# EAGLE board roboboard2 (EAGLE 6.3)
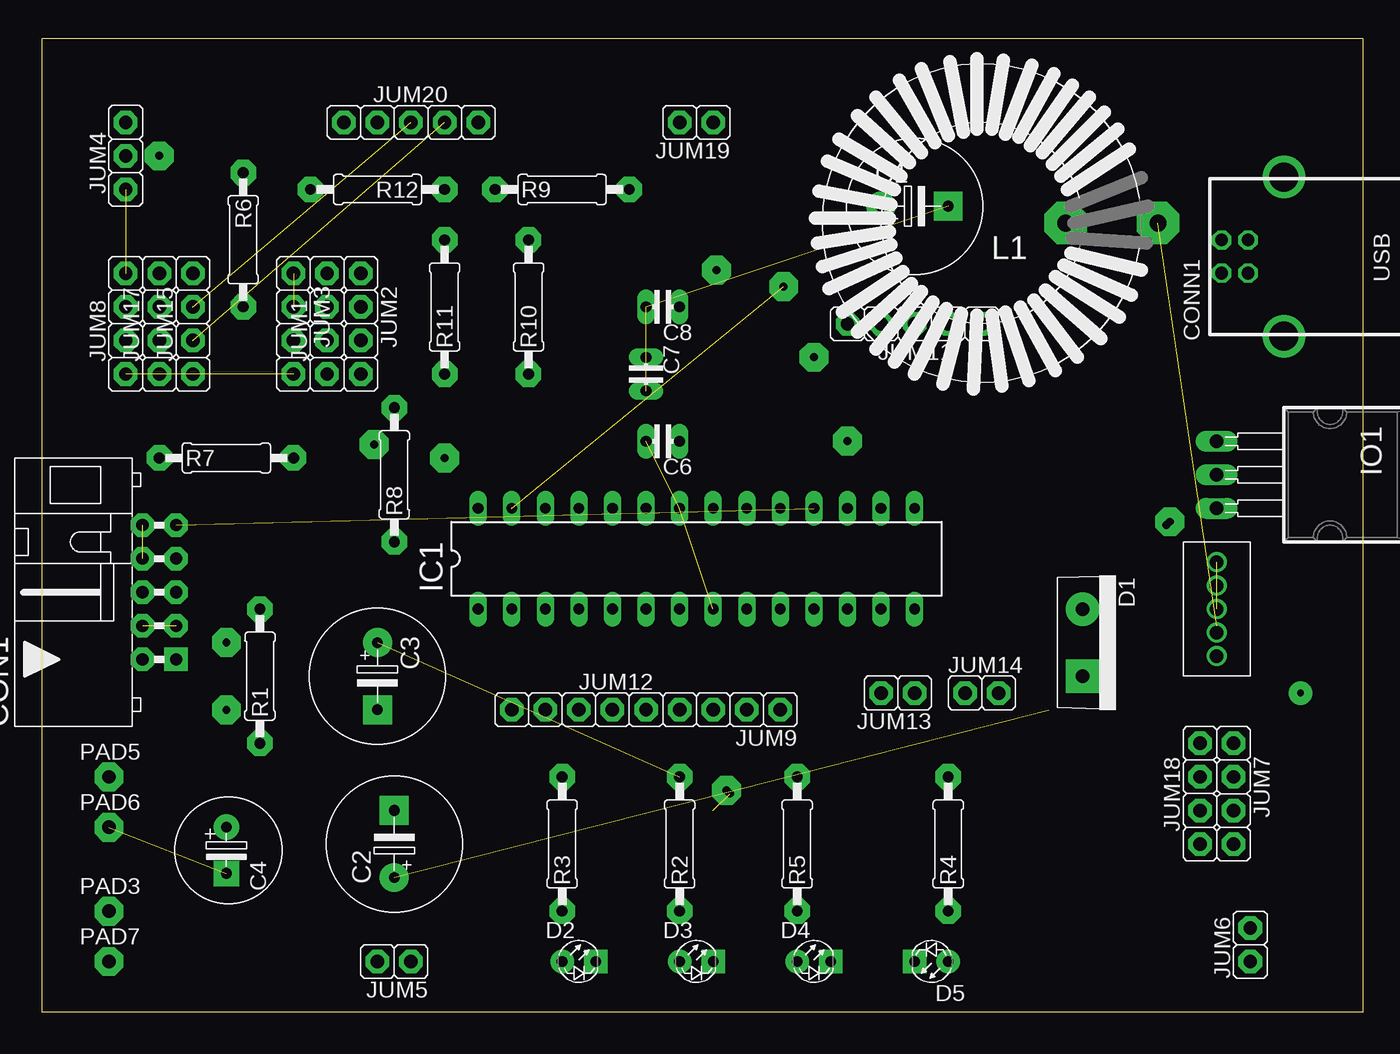
[diagram p0: board, top side]
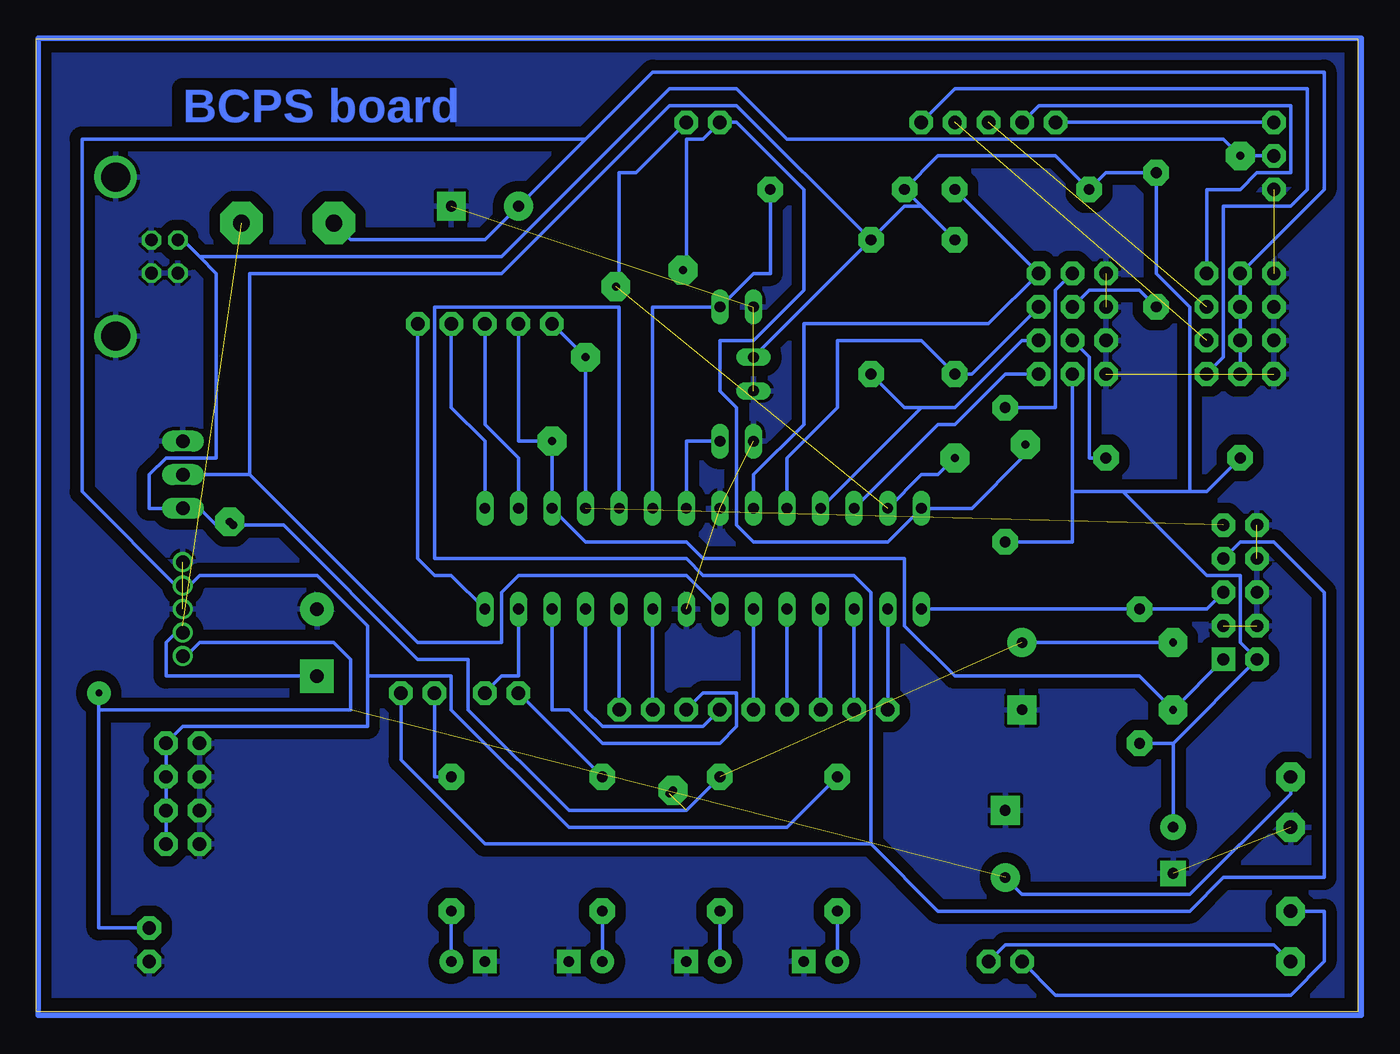
[diagram p1: board, bottom side, seen from below]

Size 100 x 73.65 mm. Coordinates in mm from the lower left corner, seen from the top.
Outline: 0,0 100,0 100,73.65 0,73.65 0,0
Copper layers (1*16): Top 0.035mm / dielectric 1.5mm / Bottom 0.035mm
Design rules "default": minimum track width 10mil, minimum drill 24mil, track to track 8mil, track to pad 8mil, pad to pad 8mil, via to via 8mil, smd to smd 8mil, copper to edge 40mil, drill to drill 8mil, minimum pad ring 10mil, minimum via ring 8mil, stop-mask expansion 4mil, vias tented up to drill 0mil, thermal gap 10mil

## Footprints (pad centres in the part's own frame; a part is rotated, then mirrored left to right if it is on the bottom)
C-EL_5 = drill 0.813 pad 2.184: C+ -2.54,0 | drill 0.813 pad 2.184 square: C- 2.54,0
C-EL_3,5 = drill 0.813 pad 1.93: C+ 0,0 | drill 0.813 pad 1.93 square: C- 3.493,0
C-2,5 = drill 0.813 pad 1.27 long: 1 -1.27,0; 2 1.27,0
MLW10A = drill 0.914 pad 1.778 square: 1 -5.08,-1.27 | drill 0.914 pad 1.778 octagon: 2 -5.08,1.27; 3 -2.54,-1.27; 4 -2.54,1.27; 5 0,-1.27; 6 0,1.27; 7 2.54,-1.27; 8 2.54,1.27; 9 5.08,-1.27; 10 5.08,1.27
PN61729 = drill 0.95 octagon: 1 1.25,4.71; 2 -1.25,4.71; 3 -1.25,2.71; 4 1.25,2.71 | drill 2.2: P$1 -6.02,0; P$2 6.02,0
TO-220AC = drill 1.016 pad 2.54: A -2.54,0 | drill 1.016 pad 2.54 square: K 2.54,0
LED_3 = drill 0.813 pad 1.778: A -1.27,0 | drill 0.813 pad 1.778 square: K 1.27,0
DIL28-3 = drill 0.813 long: 1 -16.51,-3.81; 2 -13.97,-3.81; 3 -11.43,-3.81; 4 -8.89,-3.81; 5 -6.35,-3.81; 6 -3.81,-3.81; 7 -1.27,-3.81; 8 1.27,-3.81; 9 3.81,-3.81; 10 6.35,-3.81; 11 8.89,-3.81; 12 11.43,-3.81; 13 13.97,-3.81; 14 16.51,-3.81; 15 16.51,3.81; 16 13.97,3.81; 17 11.43,3.81; 18 8.89,3.81; 19 6.35,3.81; 20 3.81,3.81; 21 1.27,3.81; 22 -1.27,3.81; 23 -3.81,3.81; 24 -6.35,3.81; 25 -8.89,3.81; 26 -11.43,3.81; 27 -13.97,3.81; 28 -16.51,3.81
TO-220 = drill 1.016 pad 1.6 long: 1 -2.54,0; 2 0,0; 3 2.54,0
S1G4_JUM = drill 1.016 pad 1.778 octagon: 1 -3.81,0; 2 -1.27,0; 3 1.27,0; 4 3.81,0
S1G3_JUM = drill 1.016 pad 1.778 octagon: 1 -2.54,0; 2 0,0; 3 2.54,0
S1G2_JUM = drill 1.016 pad 1.778 octagon: 1 -1.27,0; 2 1.27,0
S1G5_JUM = drill 1.016 pad 1.778 octagon: 1 -5.08,0; 2 -2.54,0; 3 0,0; 4 2.54,0; 5 5.08,0
S1G7_JUM = drill 1.016 pad 1.778 octagon: 1 -7.62,0; 2 -5.08,0; 3 -2.54,0; 4 0,0; 5 2.54,0; 6 5.08,0; 7 7.62,0
FED_2200 = drill 1.27 pad 3.2 octagon: 1 -13.335,0; 2 -6.35,0
PAD_1 = drill 1.016 pad 2.184 octagon: 1 0,0
R-10 = drill 0.813 pad 1.93 octagon: 1 -5.08,0; 2 5.08,0
LM2576 = drill 1.016: 1 -3.556,0; 2 -1.778,0; 3 0,0; 4 1.778,0; 5 3.556,0

## Placement (x,y rotation side)
C1  1000uF  [C-EL_5]  66.04,60.96 0 top
C2  100uF  [C-EL_5]  26.67,12.7 90 top
C3  0,47uF  [C-EL_5]  25.4,25.4 270 top
C4  0,33uF  [C-EL_3,5]  13.97,13.97 270 top
C6  100n  [C-2,5]  46.99,43.18 180 top
C7  100n  [C-2,5]  45.72,48.26 270 top
C8  100n  [C-2,5]  46.99,53.34 180 top
CON1  ISP  [MLW10A]  8.89,31.75 90 top
CONN1  USB  [PN61729]  93.98,57.15 90 top
D1  1N5822  [TO-220AC]  78.74,27.94 270 top
D2  LED_3  [LED_3]  40.64,3.81 0 top
D3  LED_3  [LED_3]  49.53,3.81 0 top
D4  LED_3  [LED_3]  58.42,3.81 0 top
D5  LED_3  [LED_3]  67.31,3.81 180 top
IC1  MEGA8-P  [DIL28-3]  49.53,34.29 0 top
IO1  LM3940IT  [TO-220]  88.9,40.64 270 top
JUM1  senzory_ir_reflex  [S1G4_JUM]  21.59,52.07 90 top
JUM2  senzory_ir_reflex_signal  [S1G4_JUM]  24.13,52.07 270 top
JUM3  senzory_ir_reflex_GND  [S1G4_JUM]  19.05,52.07 270 top
JUM4  regulator_vstup  [S1G3_JUM]  6.35,64.77 90 top
JUM5  motor_6V_out  [S1G2_JUM]  26.67,3.81 180 top
JUM6  napajeni_Maestro  [S1G2_JUM]  91.44,5.08 90 top
JUM7  piny_+5V  [S1G4_JUM]  90.17,16.51 270 top
JUM8  senzor_vzdal_-  [S1G4_JUM]  6.35,52.07 90 top
JUM9  S1G2_JUMP  [S1G2_JUM]  54.61,22.86 180 top
JUM11  S1G5_JUMP  [S1G5_JUM]  66.04,52.07 180 top
JUM12  S1G7_JUMP  [S1G7_JUM]  43.18,22.86 0 top
JUM13  jumper  [S1G2_JUM]  64.77,24.13 180 top
JUM14  jumper1  [S1G2_JUM]  71.12,24.13 0 top
JUM15  senzor_vzdal_signal_in  [S1G4_JUM]  11.43,52.07 90 top
JUM17  senzor_vzdal_+  [S1G4_JUM]  8.89,52.07 90 top
JUM18  piny_-5V  [S1G4_JUM]  87.63,16.51 90 top
JUM19  I2C  [S1G2_JUM]  49.53,67.31 180 top
JUM20  out_vzdal_senzor_signal  [S1G5_JUM]  27.94,67.31 0 top
L1  100uH  [FED_2200]  71.12,59.69 180 top
PAD3  motor_6V_in  [PAD_1]  5.08,7.62 0 top
PAD5  11,1V  [PAD_1]  5.08,17.78 0 top
PAD6  PAD_1-  [PAD_1]  5.08,13.97 0 top
PAD7  6V_motor  [PAD_1]  5.08,3.81 0 top
R1  10k  [R-10]  16.51,25.4 90 top
R2  120  [R-10]  48.26,12.7 90 top
R3  120  [R-10]  39.37,12.7 90 top
R4  120  [R-10]  68.58,12.7 90 top
R5  120  [R-10]  57.15,12.7 90 top
R6  120  [R-10]  15.24,58.42 270 top
R7  120  [R-10]  13.97,41.91 0 top
R8  120  [R-10]  26.67,40.64 90 top
R9  10uH  [R-10]  39.37,62.23 0 top
R10  120  [R-10]  36.83,53.34 90 top
R11  120  [R-10]  30.48,53.34 90 top
R12  120  [R-10]  25.4,62.23 180 top
U$1  LM2576  [LM2576]  88.9,30.48 90 top

## Library data of the parts
C1-C4 C6-C8 CON1 D1-D5 IO1 JUM1-JUM9 JUM11-JUM15 JUM17-JUM20 L1 PAD3 PAD5-PAD7 R1-R12 = #PaJa_22
CONN1 = dodolcd
IC1 = atmel; OC_FARNELL: unknown; OC_NEWARK: unknown
U$1 = LM2576

## Nets
+5V: C1.C+ JUM7.1 JUM7.2 JUM7.3 JUM7.4 JUM17.1 JUM17.2 JUM17.3 JUM17.4 L1.2 R3.2 U$1.4
GND: C1.C- C2.C- C3.C- C4.C- C6.2 C7.2 C8.2 CON1.3 CON1.4 CON1.6 CON1.8 CON1.10 CONN1.2 CONN1.3 CONN1.4 CONN1.P$1 CONN1.P$2 D1.A D2.K D3.K D4.K D5.K IC1.8 IC1.22 IO1.1 JUM3.1 JUM3.2 JUM3.3 JUM3.4 JUM4.1 JUM6.1 JUM8.1 JUM8.2 JUM8.3 JUM8.4 JUM18.1 JUM18.2 JUM18.3 JUM18.4 PAD6.1 U$1.3 U$1.5
N$1: D1.K L1.1 U$1.2
N$2: C6.1 IC1.21
N$3: C8.1 IC1.20 R9.2
N$4: CON1.5 IC1.1 R1.2
N$5: IC1.24 JUM2.2 R11.1
N$6: IC1.25 JUM2.3 R10.1
N$7: IC1.23 JUM2.1 R12.1
N$8: IC1.26 JUM2.4
N$9: IC1.27 JUM19.1
N$10: IC1.28 JUM19.2
N$11: IC1.2 JUM12.1
N$12: IC1.3 JUM12.2
N$13: IC1.4 JUM12.3
N$14: IC1.5 JUM12.4
N$15: IC1.6 JUM12.5
N$16: IC1.11 JUM12.6
N$17: IC1.12 JUM12.7
N$18: IC1.13 JUM13.1
N$19: IC1.14 JUM11.1
N$20: IC1.15 JUM11.2
N$21: CON1.1 IC1.17 JUM11.4
N$22: IC1.16 JUM11.3
N$23: CON1.9 IC1.18 JUM11.5
N$24: CON1.7 IC1.19 JUM14.2
N$25: JUM5.1 PAD7.1
N$26: IC1.9 JUM9.2
N$28: D4.A R5.1
N$29: JUM4.3 JUM20.1
N$30: D3.A R2.1
N$31: D2.A R3.1
N$32: C2.C+ JUM6.2 PAD5.1 U$1.1
N$33: JUM5.2 PAD3.1
N$34: IC1.10 JUM9.1
N$35: D5.A R4.1
N$36: JUM13.2 R5.2
N$37: JUM1.2 R7.2
N$38: JUM1.3 R6.2
N$39: JUM1.4 R8.2
N$40: JUM14.1 R4.2
N$41: JUM15.1 JUM20.5
N$42: JUM15.2 JUM20.4
N$43: JUM15.3 JUM20.3
N$44: JUM15.4 JUM20.2
N$48: C4.C+ C7.1 CON1.2 IC1.7 IO1.2 JUM1.1 R1.1 R6.1 R7.1 R8.1 R9.1 R10.2 R11.2 R12.2
VCC: C3.C+ CONN1.1 IO1.3 JUM4.2 R2.2

## Tracks (layer width: path | path; a pad name or v marks a point on that pad's centre or on a via)
+5V
  Bottom 0.254: JUM7.4 JUM7.3 JUM7.2 JUM7.1 88.9,21.59 74.93,21.59 74.93,25.4 | 88.9,31.75 87.63,33.02 78.74,33.02 74.93,29.21 74.93,25.4 | R3.2 43.18,13.97 59.69,13.97 68.58,22.86 68.58,25.4 74.93,25.4 | JUM17.1 JUM17.2 JUM17.3 JUM17.4 2.54,62.23 2.54,71.12 53.34,71.12 58.42,66.04 | L1.2 76.2,58.42 66.04,58.42 C1.C+ 58.42,66.04 | 88.9,31.75 96.52,39.37 96.52,66.04 58.42,66.04 | 88.9,31.75 U$1.4
GND  (11 unrouted)
  pour Bottom (isolate 0.813): 0,73.66 0,0 100.33,0 100.33,73.66
N$1  (1 unrouted)
  Bottom 0.254: D1.K 90.17,25.4 90.17,27.94 88.9,29.21 U$1.2
N$2
  Bottom 0.254: IC1.21 50.8,43.18 C6.1
N$3
  Bottom 0.254: IC1.20 53.34,53.34 C8.1 45.72,55.88 44.45,55.88 R9.2
N$4
  Bottom 0.254: IC1.1 R1.2 11.43,30.48 CON1.5
N$5
  Bottom 0.254: IC1.24 43.18,41.91 39.37,45.72 39.37,50.8 33.02,50.8 R11.1 29.21,48.26 JUM2.2
N$6
  Bottom 0.254: 33.02,45.72 IC1.25 | 33.02,45.72 30.48,45.72 25.4,50.8 JUM2.3 | R10.1 34.29,45.72 33.02,45.72
N$7
  Bottom 0.254: IC1.23 45.72,40.64 41.91,44.45 41.91,52.07 27.94,52.07 JUM2.1 R12.1
N$8
  Bottom 0.254: IC1.26 31.75,44.45 30.48,44.45 26.67,48.26 JUM2.4
N$9  (via drill 0.6 pad 1.27, 0.6 pad 2.18)  (1 unrouted)
  Bottom 0.254: v30.48,41.91 31.75,40.64 33.02,40.64 IC1.27 | JUM19.1 54.61,63.5 55.88,63.5 55.88,55.88 v56.13,54.86
N$10  (via drill 0.6 pad 2.18)
  Bottom 0.254: v25.15,42.93 25.4,41.91 29.21,38.1 IC1.28 35.56,35.56 45.72,35.56 46.99,36.83 46.99,45.72 48.26,46.99 48.26,50.8 45.72,50.8 41.91,54.61 41.91,62.23 46.99,67.31 JUM19.2 49.53,66.04 50.8,66.04 50.8,57.15 v51.05,56.13
N$11
  Bottom 0.254: JUM12.1 IC1.2
N$12
  Bottom 0.254: JUM12.2 IC1.3
N$13
  Bottom 0.254: JUM12.3 IC1.4
N$14
  Bottom 0.254: JUM12.4 IC1.5
N$15
  Bottom 0.254: JUM12.5 IC1.6
N$16
  Bottom 0.254: IC1.11 58.42,22.86 57.15,21.59 49.53,21.59 JUM12.6
N$17
  Bottom 0.254: IC1.12 60.96,22.86 59.69,22.86 57.15,20.32 48.26,20.32 46.99,21.59 46.99,24.13 49.53,24.13 JUM12.7
N$18
  Bottom 0.254: IC1.13 63.5,25.4 64.77,25.4 JUM13.1
N$19
  Bottom 0.254: IC1.14 68.58,33.02 69.85,33.02 71.12,34.29 JUM11.1
N$20
  Bottom 0.254: IC1.15 66.04,43.18 68.58,45.72 JUM11.2
N$21  (via drill 0.6 pad 2.18)
  Bottom 0.254: CON1.1 v13.97,22.86 16.51,25.4 30.48,25.4 34.29,29.21 34.29,34.29 49.53,34.29 50.8,35.56 58.42,35.56 IC1.17 v60.96,43.18 63.5,43.18 JUM11.4
N$22
  Bottom 0.254: IC1.16 63.5,41.91 66.04,44.45 JUM11.3
N$23  (via drill 0.6 pad 2.18)  (1 unrouted)
  Bottom 0.254: JUM11.5 v58.42,49.53 IC1.18
N$24
  Bottom 0.254: IC1.19 55.88,53.34 69.85,53.34 69.85,34.29 50.8,34.29 49.53,33.02 38.1,33.02 36.83,31.75 36.83,12.7 | 36.83,12.7 66.04,12.7 72.39,19.05 JUM14.2 | CON1.7 8.89,35.56 6.35,35.56 2.54,31.75 2.54,10.16 10.16,10.16 12.7,7.62 31.75,7.62 36.83,12.7
N$25
  Bottom 0.254: JUM5.1 26.67,5.08 6.35,5.08 PAD7.1
N$26
  Bottom 0.254: JUM9.2 IC1.9
N$27  (via drill 0.6 pad 2.18)
  other vias: 51.82,16.76
N$28
  Bottom 0.254: R5.1 D4.A
N$29
  Bottom 0.254: JUM20.1 JUM4.3
N$30
  Bottom 0.254: R2.1 D3.A
N$31
  Bottom 0.254: R3.1 D2.A
N$32  (via drill 0.5 pad 1.78)  (1 unrouted)
  Bottom 0.254: C2.C+ 25.4,8.89 12.7,8.89 5.08,16.51 PAD5.1 | 95.25,22.86 95.25,6.35 JUM6.2 | 95.25,22.86 v95.25,24.13 | 95.25,22.86 76.2,22.86 76.2,26.67 77.47,27.94 87.63,27.94 88.9,26.67 U$1.1
N$33
  Bottom 0.254: JUM5.2 22.86,1.27 5.08,1.27 2.54,3.81 2.54,7.62 PAD3.1
N$34
  Bottom 0.254: JUM9.1 IC1.10
N$35
  Bottom 0.254: R4.1 D5.A
N$36
  Bottom 0.254: R5.2 JUM13.2
N$37
  Bottom 0.254: JUM1.2 20.32,49.53 20.32,41.91 R7.2
N$38
  Bottom 0.254: JUM1.3 20.32,54.61 16.51,54.61 R6.2
N$39
  Bottom 0.254: JUM1.4 22.86,54.61 22.86,45.72 R8.2
N$40
  Bottom 0.254: JUM14.1 69.85,17.78 R4.2
N$41
  Bottom 0.254: JUM15.1 10.16,49.53 10.16,60.96 5.08,60.96 3.81,62.23 3.81,69.85 30.48,69.85 JUM20.5
N$42  (1 unrouted)
N$43  (1 unrouted)
N$44
  Bottom 0.254: JUM15.4 11.43,62.23 8.89,62.23 7.62,63.5 5.08,63.5 5.08,68.58 24.13,68.58 JUM20.2
N$48
  Bottom 0.254: IC1.7 50.8,33.02 63.5,33.02 64.77,31.75 64.77,27.94 71.12,27.94 83.82,40.64 | IO1.2 83.82,40.64 | R10.2 C7.1 | 33.02,60.96 R9.1 31.75,64.77 22.86,64.77 R12.2 19.05,63.5 R6.1 15.24,55.88 12.7,53.34 12.7,39.37 | 33.02,60.96 R11.2 | R10.2 34.29,60.96 33.02,60.96 | 13.97,20.32 CON1.2 8.89,27.94 8.89,33.02 11.43,33.02 17.78,39.37 | R1.1 13.97,20.32 | 13.97,20.32 C4.C+ | 21.59,39.37 21.59,35.56 R8.1 | 21.59,39.37 JUM1.1 | R7.1 11.43,39.37 12.7,39.37 | 21.59,39.37 17.78,39.37 | 17.78,39.37 12.7,39.37 | 83.82,40.64 83.82,55.88 64.77,55.88 52.07,68.58 46.99,68.58 R10.2
N$54
  Bottom 0.406: -0.25,73.66 99.82,73.66 99.82,-0.25 -0.25,-0.25 -0.25,73.66
VCC  (via drill 0.6 pad 1.27, 0.6 pad 2.18)  (2 unrouted)
  Bottom 0.254: JUM4.2 v8.89,64.77 10.16,66.04 43.18,66.04 46.99,69.85 52.07,69.85 64.77,57.15 87.63,57.15 | 87.63,57.15 86.36,55.88 86.36,41.91 90.17,41.91 91.44,40.64 91.44,38.1 IO1.3 87.63,38.1 86.36,36.83 v85.34,37.08 v85.09,36.83 81.28,36.83 71.12,26.67 67.31,26.67 67.31,22.86 59.69,15.24 50.8,15.24 R2.2 | 87.63,57.15 88.9,58.42 CONN1.1 | C3.C+ v13.97,27.94
  other vias: 52.07,16.51

## Text on the board
Bottom: BCPS board